# Altium PCB PCB2.PcbDoc
Units mil, origin at the board's own origin, x right, y up, seen from the top; angles counter-clockwise.
Board outline 2785 x 1790 mil, 2 copper layers (Top Layer, Bottom Layer); 33 components, 24 nets, 140 pads, 15 vias.
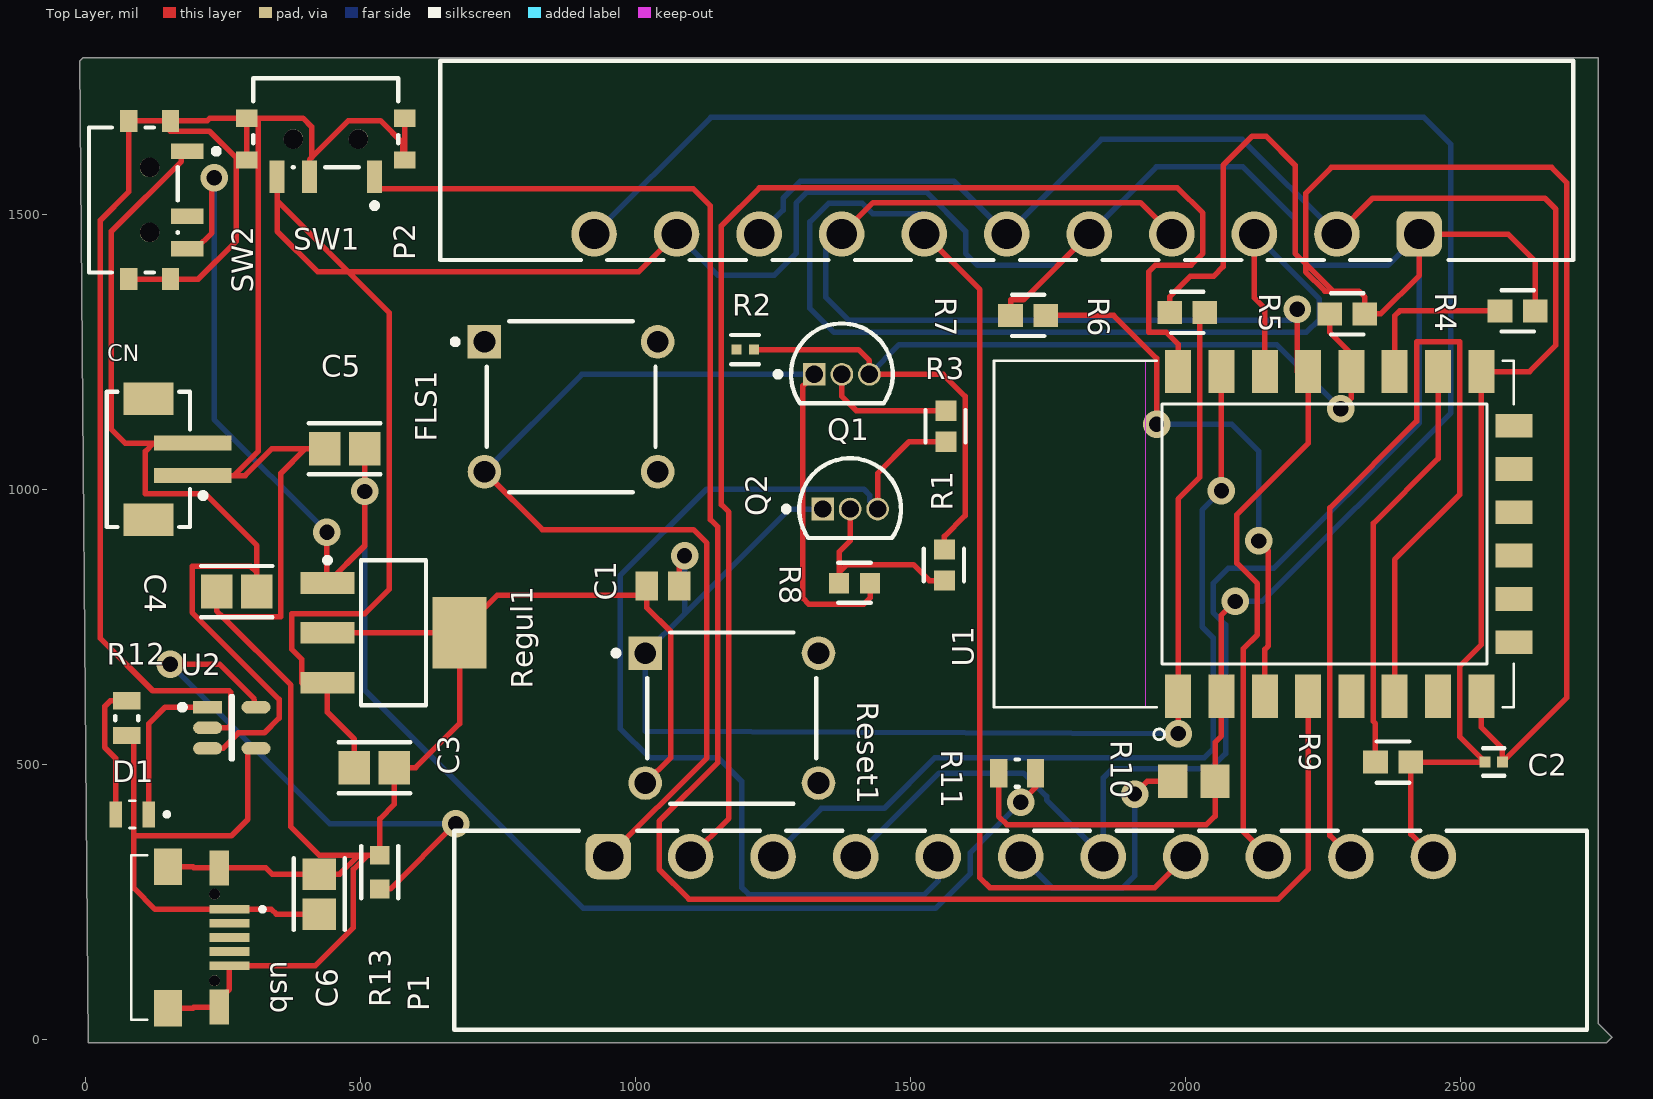
[diagram p0: Top Layer view]
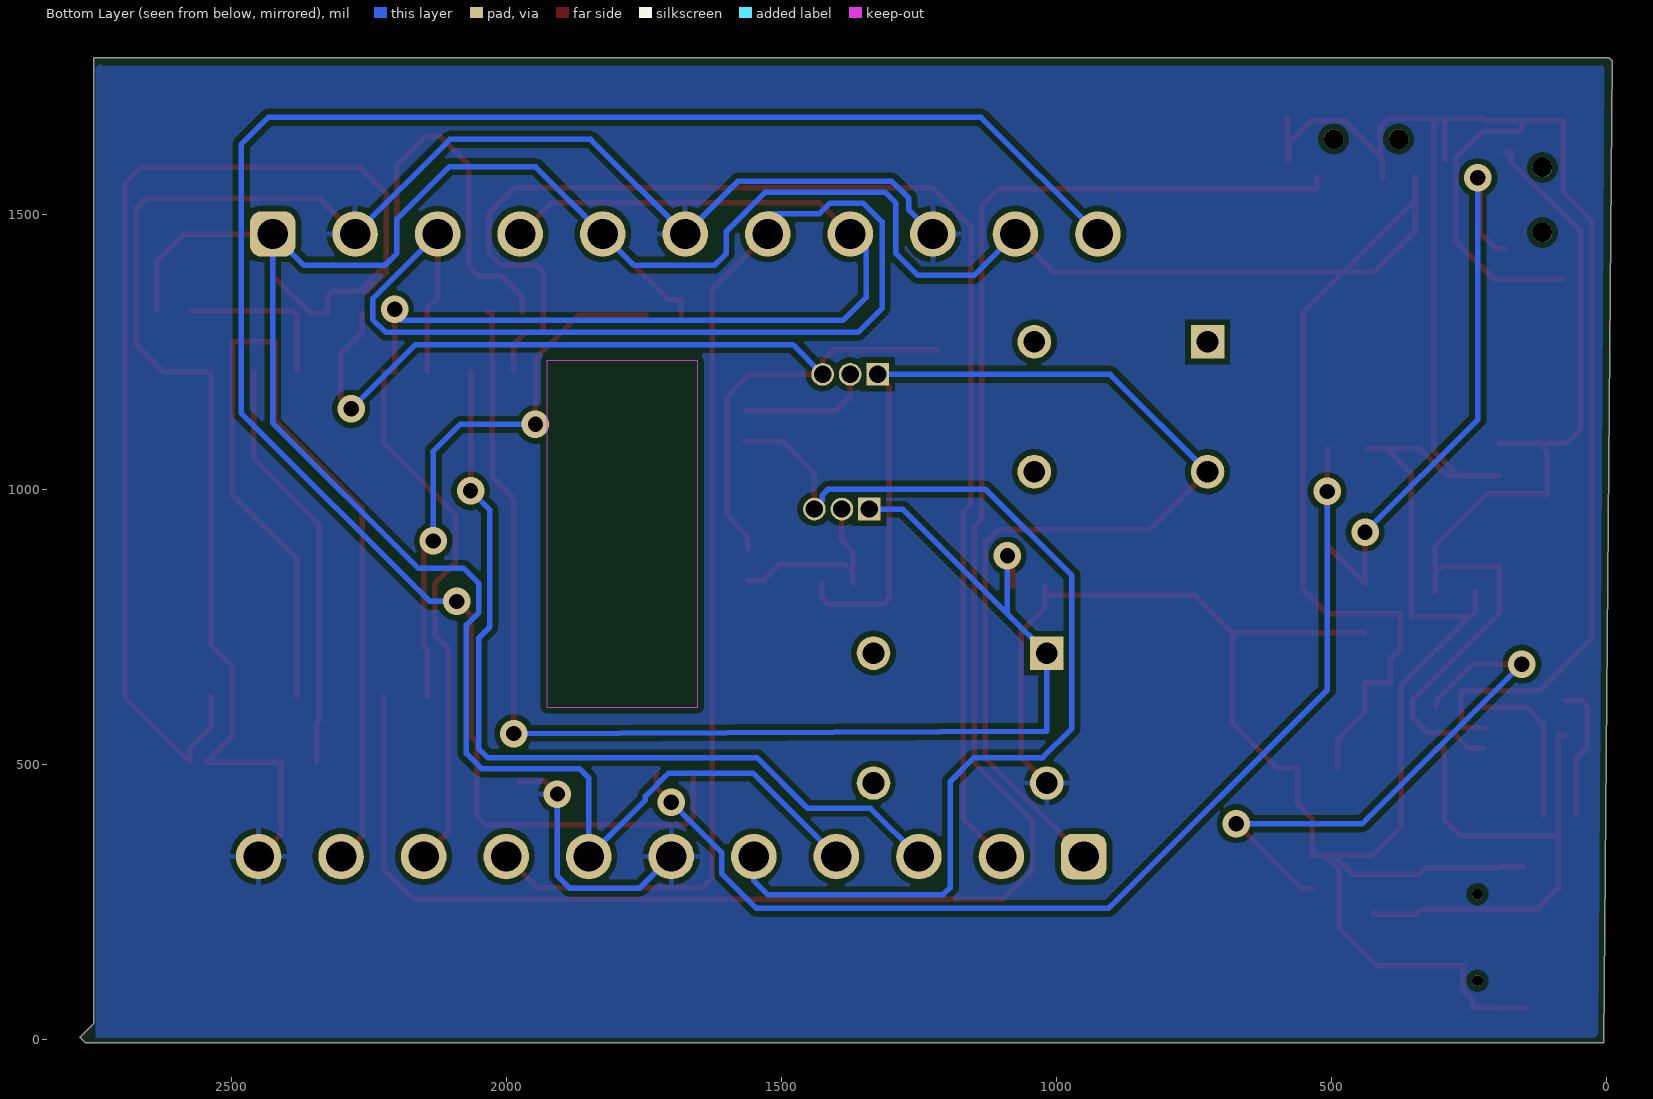
[diagram p1: Bottom Layer view, seen from below]
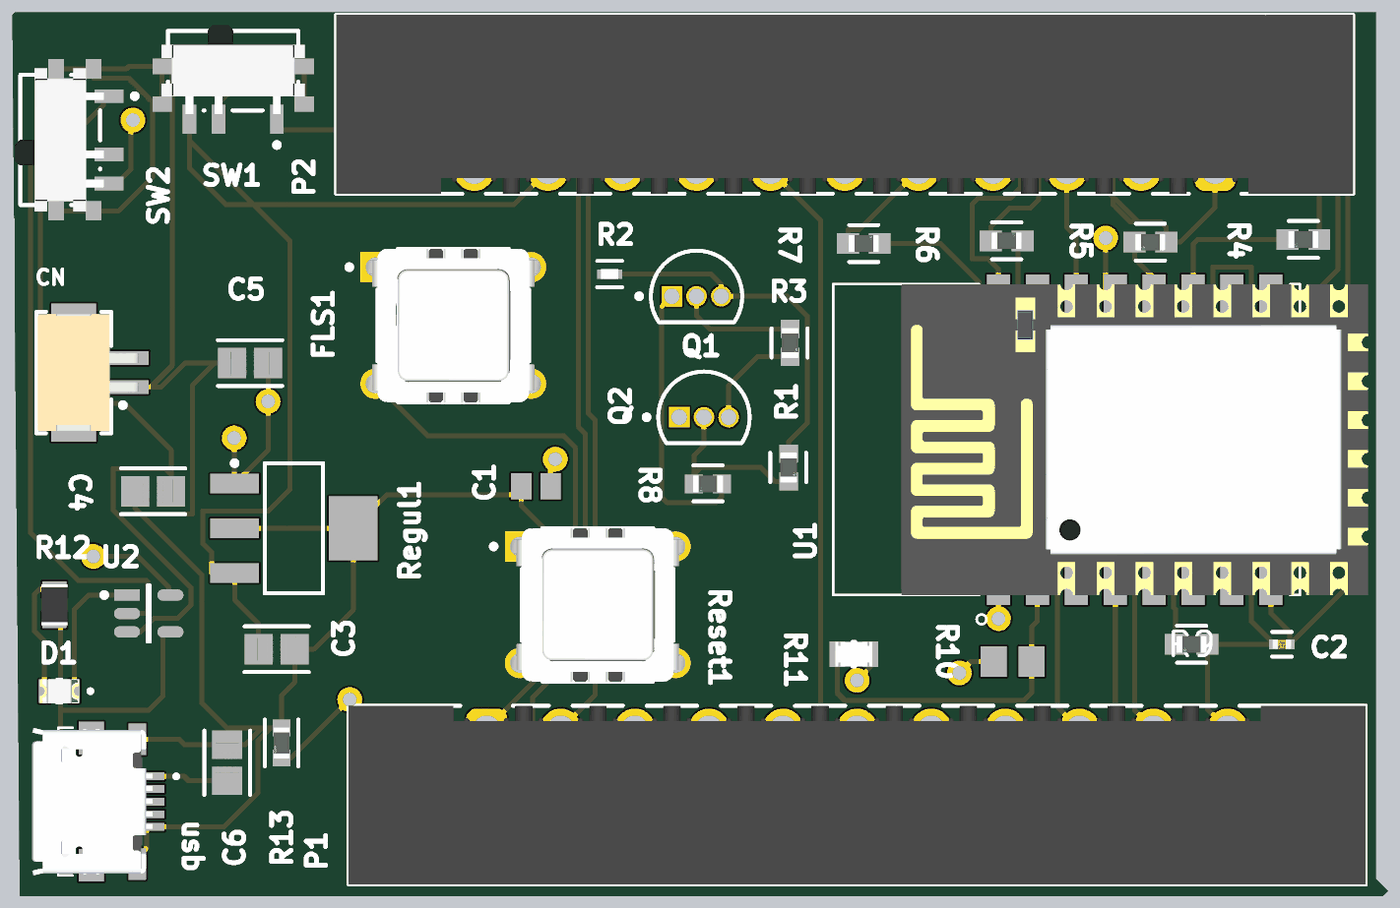
[diagram p2: 3D render of the assembled board from above, using the file's embedded part models]

## Layer stack, top to bottom
Top Solder: solder mask 0.4, Solder Resist, Dk 3.5
Top Layer: signal copper 1.4
Dielectric 1: dielectric 12.6, FR-4, Dk 4.8
Bottom Layer: signal copper 1.4
Bottom Solder: solder mask 0.4, Solder Resist, Dk 3.5

## Board outline
5,-5 2765,-5 2775,5 2750,30 2750,1785 -5,1785 -10,1780

## Design rules (kind name [scope] priority, off if disabled: settings)
Clearance Clearance_3 [All] p1: gap=10 ignorepadtopadclearanceinfootprint=TRUE
Clearance Clearance_2 [All] p2: gap=10 ignorepadtopadclearanceinfootprint=TRUE
Clearance Clearance_1 [All] p3: gap=10 ignorepadtopadclearanceinfootprint=TRUE
Clearance [All] p4: gap=10 ignorepadtopadclearanceinfootprint=FALSE
PolygonConnect [All] p1: connectstyle=Relief reliefconductorwidth=10 reliefentries=4 polygonreliefangle="90 Angle" airgapwidth=10
RoutingVias [All] p1: holewidth=28 width=50 viastyle="Through Hole" minholewidth=28 minwidth=50 maxholewidth=28 maxwidth=50
SolderMaskExpansion [All] p1: expansion=4 istentingtop=FALSE
Width [All] p1: maxlimit=10 minlimit=10 preferedwidth=10
30 further rules are at their usual default settings.

## Components (designator, comment, footprint, x,y, rotation, side; value= is the part's Value field where it differs from the comment)
C1 "4.7 nF" CAPC2013X135X50LL15T20 1050,825 r180 top
C2 "C0402C104K4RACTU" FP-C0402-BB-MFG 2560,505 r180 top value="0.10 μF"
C3 "10 uF" FP-CL21-IPC_A 525,495 r0 top
C4 "4.7 uF" FP-CL21-IPC_A 275,815 r180 top
C5 "10 uF" FP-CL21-IPC_A 471.23,1074.76 r180 top
C6 "4.7 uF" FP-CL21-IPC_A 425,265 r90 top
CN "679302124022" 679302124022 114.29,1055.47 r270 top
D1 "KT-0805W" LED_KT-0805W 85,410 r180 top
FLS1 "ESE-20C421" FP-ESE-20C421-MFG 882.69,1150.95 r0 top
P1 "691701350011B" 691701350011B 1700.14,199.4 r0 top
P2 "691701350011B" 691701350011B 1674.72,1598.87 r180 top
Q1 "BC547C" ONSC-TO-92-3-29-11 1375,1210 r0 top
Q2 "BC547C" ONSC-TO-92-3-29-11 1390,965 r0 top
R1 "22k" FP-CRCW0603-e3-IPC_B 1561.54,863.27 r270 top value=22kR
R2 "330" FP-CRCW0402-e3-IPC_C 1199.17,1255 r0 top
R3 "22k" FP-CRCW0603-e3-IPC_B 1564.29,1115.53 r270 top value=22kR
R4 "12k" FP-CRCW0603-e3-IPC_A 2603.52,1325.15 r180 top value=12kR
R5 "12k" FP-CRCW0603-e3-IPC_A 2293.74,1319.65 r180 top value=12kR
R6 "12k" FP-CRCW0603-e3-IPC_A 2002.78,1322.4 r0 top value=12kR
R7 "12k" FP-CRCW0603-e3-IPC_A 1713.64,1316.9 r0 top value=12kR
R8 "22k" FP-CRCW0603-e3-IPC_B 1398.17,830 r180 top value=22kR
R9 "12k" FP-CRCW0603-e3-IPC_A 2377.1,505 r180 top value=12kR
R10 "47k" RESC2013X70X40ML20T20 2015,470 r180 top
R11 "15k" FP-CRCW0805-e3-IPC_C 1693.5,485 r180 top
R12 "470" RESC2013X60X35LL10T20 75,585 r270 top
R13 "2k" FP-AC0603-IPC_B 535,305 r270 top
Regul1 "TC1262-3.3VDBTR" SOT-223-DB3_M 560,740 r0 top
Reset1 "ESE-20C421" FP-ESE-20C421-MFG 1175,585 r0 top
SW1 "PCM12SMTR" FP-PCM12SMTR-MFG 436.95,1667.19 r180 top
SW2 "PCM12SMTR" FP-PCM12SMTR-MFG 87.01,1526.88 r270 top
U1 "ESP8266-12E/ESP-12E" XCVR_ESP8266-12E/ESP-12E 2261.89,919.72 r90 top
U2 "MCP73831T-2ACI/OT" FP-C04-091-OT-IPC_B 266.05,567.4 r0 top
usb "MICROQTJ" SHOUHAN_MICROQTJ 234.65,186.26 r270 top (schematic designator J1)

## Footprints (in the part's own frame and the unit in brackets; to place one, negate y for a bottom-side part, rotate by r counter-clockwise, add the part's x,y. Pads: shape width x height; smd on the part's side, far side on the other; paste and mask are expansions set on the pad)
679302124022 [mm] "1.50mm SMT Male Vertical Shrouded Header, 2p"
  rect 0.7x3.6 smd: 1(0.75,2.05) 2(-0.75,2.05)
  rect 1.5x2.3 smd: MP1(-2.8,0) MP2(2.8,0)
  silkscreen extent -3.13,-1.93 3.13,2.65, body extent -3,-1.85 3,3.35, height 5.49
691701350011B [mm] "Horizontal PCB Header THR Type with Flanges, pitch 3.81mm, 11p"
  rrect50% 2.1x2.1 hole 1.4: 1(-19.05,3.4)
  round 2.1 hole 1.4: 2(-15.24,3.4) 3(-11.43,3.4) 4(-7.62,3.4) 5(-3.81,3.4) 6(0,3.4) 7(3.81,3.4) 8(7.62,3.4) 9(11.43,3.4) 10(15.24,3.4) 11(19.05,3.4)
  silkscreen extent -26.15,-4.6 26.15,4.6, body extent -26.15,-4.6 26.15,4.6, height 7.35
CAPC2013X135X50LL15T20 [mm] "Chip Capacitor, 2-Leads, Body 2.00x1.25mm, IPC High Density"
  rect 1.05x1.35 smd: 1(-0.75,0) 2(0.75,0)
  body extent -1.08,-0.7 1.07,0.7, height 1.35
FP-AC0603-IPC_B [mil]
  rect 33.81x35.91 smd paste+0 mask+0: 1(-30.58,0) 2(30.58,0)
  silkscreen extent -47,-34 47,34, body extent -57,-28 57,28, height 10
FP-C04-091-OT-IPC_B [mm]
  rect 1.338x0.578 smd paste+0 mask+0: 1(-1.116,0.95)
  rrect100% 1.338x0.578 smd paste+0 mask+0: 2(-1.116,0) 3(-1.116,-0.95) 4(1.116,-0.95) 5(1.116,0.95)
  silkscreen extent -2.41,-1.45 0.05,1.45
FP-C0402-BB-MFG [mm]
  rect 0.52x0.52 smd paste+0 mask+0: 1(-0.4,0) 2(0.4,0)
  silkscreen extent -0.5,-0.64 0.5,0.64, body extent -0.8,-0.4 0.8,0.4, height 0.25
FP-CL21-IPC_A [mil]
  rect 57.27x61.27 smd paste+0 mask+0: 1(-36.45,0) 2(36.45,0)
  silkscreen extent -65,-46 65,46, body extent -85,-50 85,50, height 10
FP-CRCW0402-e3-IPC_C [mil]
  rect 18.43x18.6 smd paste+0 mask+0: 1(-15.83,0) 2(15.83,0)
  silkscreen extent -25,-27 25,27, body extent -29,-15 29,15, height 10
FP-CRCW0603-e3-IPC_A [mil]
  rect 44.69x41.82 smd paste+0 mask+0: 1(-32.1,0) 2(32.1,0)
  silkscreen extent -30,-37 30,37, body extent -74,-41 74,41, height 10
FP-CRCW0603-e3-IPC_B [mil]
  rect 36.81x37.88 smd paste+0 mask+0: 1(-28.17,0) 2(28.17,0)
  silkscreen extent -30,-37 30,35, body extent -56,-29 56,29, height 10
FP-CRCW0805-e3-IPC_C [mil]
  rect 31.75x51.5 smd paste+0 mask+0: 1(-33.5,0) 2(33.5,0)
  silkscreen extent -3,-25 3,25, body extent -53,-31 53,31, height 10
FP-ESE-20C421-MFG [mm]
  rect 1.55x1.55 hole 1 paste-2539.97 mask+0: a(-4,3)
  round 1.55 hole 1 paste-2539.97 mask+0: b(-4,-3) c(4,3) d(4,-3)
  silkscreen extent -5.47,-3.95 3.9,3.95, body extent -4.87,-4.05 4.87,4.05, height 0.25
FP-PCM12SMTR-MFG [mm]
  rect 0.7x1.5 smd paste+0 mask+0: 1(-2.25,2.5) 2(0.75,2.5) 3(2.25,2.5)
  rect 1x0.8 smd paste+0 mask+0: 4(-3.65,1.715) 5(3.65,1.715) 6(-3.65,-0.215) 7(3.65,-0.215)
  round 0.9 hole 0.9 unplated paste-2539.97 mask+0: ""(-1.5,0.75) ""(1.5,0.75)
  silkscreen extent -3.35,-2.05 3.35,3.95, body extent -4.25,-2.15 4.25,3.35, height 0.25
LED_KT-0805W [mm]
  rect 0.57x1.2 smd: A(0.765,0) C(-0.765,0)
  silkscreen extent -1.7,-0.62 0.13,0.62, body extent -1,-0.63 1,0.63, height 0.8
ONSC-TO-92-3-29-11 [mm] "TO, 3-Leads, Body Dia 4.7mm, Pitch 1.27mm"
  rect 1.05x1.05 hole 0.8: 1(-1.27,0)
  round 1.05 hole 0.8: 2(0,0) 3(1.27,0)
  silkscreen extent -3.07,-1.34 2.35,2.35, body extent -2.35,-1.33 2.36,2.36, height 7.87
RESC2013X60X35LL10T20 [mm] "Chip Resistor, 2-Leads, Body 2.1x1.35mm, IPC High Density"
  rect 0.8x1.25 smd: 1(-0.8,0) 2(0.8,0)
  silkscreen extent -0.1,-0.53 0.1,0.53, body extent -1.05,-0.67 1.05,0.68, height 0.6
RESC2013X70X40ML20T20 [mm] "Chip Resistor, 2-Leads, Body 2.00x1.25mm, IPC Low Density"
  rect 1.35x1.55 smd: 1(-0.975,0) 2(0.975,0)
  body extent -1.1,-0.72 1.1,0.72, height 0.7
SHOUHAN_MICROQTJ [mm]
  rect 0.4x1.85 smd: 1(-1.3,0.685) 2(-0.65,0.685) 3(0,0.685) 4(0.65,0.685) 5(1.3,0.685)
  rect 1.625x0.9 smd: SH1(-3.212,0.21) SH2(3.212,0.21)
  rect 1.69x1.3 smd: SH3(-3.27,-2.15) SH4(3.27,-2.15)
  round 0.5 hole 0.5 unplated: ""(-2,0) ""(2,0)
  silkscreen extent -3.8,-3.85 3.8,2.31, body extent -3.8,-5.2 3.8,1, height 2.58
SOT-223-DB3_M [mm] "SOT223, 4-Leads, Body 6.5x3.5mm, Pitch 2.3mm, Lead Span 7mm, IPC Low Density"
  rect 2.5x1 smd: 1(-3.05,2.3) 2(-3.05,0) 3(-3.05,-2.3)
  rect 2.5x3.3 smd: 4(3.05,0)
  silkscreen extent -3.17,-3.35 1.5,3.47, body extent -1.85,-3.35 1.85,3.35, height 1.8
XCVR_ESP8266-12E/ESP-12E [mm]
  rect 2x1.2 smd: 1(-7.5,7) 2(-7.5,5) 3(-7.5,3) 4(-7.5,1) 5(-7.5,-1) 6(-7.5,-3) 7(-7.5,-5) 8(-7.5,-7) 15(7.5,-7) 16(7.5,-5) 17(7.5,-3) 18(7.5,-1) 19(7.5,1) 20(7.5,3) 21(7.5,5) 22(7.5,7)
  rect 1.1x1.7 smd: 9(-5,-8.5) 10(-3,-8.5) 11(-1,-8.5) 12(1,-8.5) 13(3,-8.5) 14(5,-8.5)
  Keep-Out Layer region: 8,8.51 -8.009,8.51 -8.009,15.5 8,15.5
  Keep-Out Layer region: 8,8.51 -8.009,8.51 -8.009,15.5 8,15.5
  silkscreen extent -9.5,-8.5 8,15.5, body extent -8,-12 8,12, height 3

## Part data
C1: library part CMP-2007-03450-1, Manufacturer=Vitramon, Part Number=VJ0805Y472KXACW1BC
C2: library part CMP-2008-02108-2, "CAP CER 0.1UF 16V X7R 0402", Capacitance="0.10 μF", Manufacturer=Kemet, Package=C0402-BB, Temperature="-55°C to +125°C", Temperature Characteristic=X7R, Temperature Coefficient=15%, Temperature Range High=+125°C, Temperature Range Low=-55°C, Tolerance=0.1, Voltage Rating="16 V", Automotive=No, Category=Cap, ComponentLink2Description=Datasheet, ComponentLink2URL=https://content.kemet.com/datasheets/KEM_C1002_X7R_SMD.pdf, Device Class L1="Passive Components", Device Class L2=Capacitors, Device Class L3="Ceramic Capacitors", Digikey Description="CAP CER 0.1UF 16V X7R 0402", Height=0.55mm, Ipc Land Pattern Name=CAPC10050X50, Lead Free=Yes, Manufacturer Part Number=C0402C104K4RACTU, Material=Ceramic, Mouser Description="Cap Ceramic 0.1uF 16V X7R 10% SMD 0402 125?C Paper T/R - Tape and Reel (Alt: C0402C104K4RAC TU)", Octopart=https://octopart.com/c0402c104k4ractu-kemet-94158, RoHS=TRUE
C3 C5: library part CMP-13271-002975-1, "CL21 Series 0805 10uF 25V ±10% Tolerance X5R Multilayer Ceramic Chip Capacitor", Capacitance=10uF, Case Code (Imperial)=0805, Case Code (Metric)=2012, Dielectric=X5R, Max Operating Temperature=85°C, Min Operating Temperature=-55°C, Package Quantity=1, Tolerance=10%, Voltage Rating=25V, Case/Package=0805, Depth=1.25mm, Height=1.25mm, Length=2mm, Mount="Surface Mount", Packaging="Tape and Reel", Radiation Hardening=No, Thickness=0.057inch, Width=0.049inch
C4 C6: library part CMP-13271-002624-1, "CL21 Series 0805 4.7uF 25V ±10% Tolerance X5R Multilayer Ceramic Chip Capacitor", Capacitance=4.7uF, Case Code (Imperial)=0805, Case Code (Metric)=2012, Dielectric=X5R, Max Operating Temperature=85°C, Min Operating Temperature=-55°C, Package Quantity=1, Tolerance=10%, Voltage Rating=25V, Case/Package=0805, Depth=1.25mm, Height=1.25mm, Lead Free="Lead Free", Length=2mm, Mount="Surface Mount", Packaging="Tape and Reel", Radiation Hardening=No, Thickness=0.055inch, Voltage Rating (DC)=25V, Width=0.049inch
CN: library part CMP-1502-00721-2, Color="Beige, White", Contact Resistance=20mΩ, Current Rating=1A, Flammability Rating="UL94 V-0", Insulation Resistance=100MΩ, Max Operating Temperature=85°C, Min Operating Temperature=-25°C, Operating Supply Voltage=50V, Connector Type="Male Pin", Contact Gender=Male, Contact Material=Copper, Contact Plating=Tin, Gender=Male, Height=5mm, Housing Material=Nylon, Insulation=Insulated, Lead Pitch=1.5mm, Length=6mm, Mount="Surface Mount", NexarPartId=18818281, Number of Contacts=2, Number of Pins=2, Number of Positions=2, Number of Rows=1, Orientation=Vertical, Packaging="Tape and Reel", Pitch=1.5mm, REACH SVHC=Unknown, RoHS=Compliant, Termination=SMD/SMT, Voltage Rating=50V, Width=6mm
D1: "Light Emitting Diodes", Package=Package, Check_prices=https://www.snapeda.com/parts/KT-0805W/Hubei+KENTO+Elec/view-part/?ref=eda, MF="Hubei KENTO Elec", MP=KT-0805W, SnapEDA_Link=https://www.snapeda.com/parts/KT-0805W/Hubei+KENTO+Elec/view-part/?ref=snap
FLS1 Reset1: library part CMP-05613-000006-1, "SWITCH PUSH SPST-NO 0.1A 14V", Contact Current Rating=100mA, Max Operating Temperature=80°C, Max Voltage Rating (DC)=14V, Min Operating Temperature=-30°C, Operating Force=4N, Package Quantity=1200, Actuator Length=5.5mm, Actuator Type=Lever, Current Rating=100mA, Lead Free="Lead Free", Mount="Through Hole", Orientation=Straight, Packaging=Bulk, Radiation Hardening=No, REACH SVHC="No SVHC", RoHS Compliant=Yes, Series=ESE20C, Switch Function=Off-Mom, Termination="PC Pin", Throw Configuration=SPST, Voltage Rating (DC)=14V
P1 P2: library part CMP-1502-02023-2, Color=Black, Connector Type="Terminal Block", Contact Material=Brass, Contact Plating=Tin, Gender=Male, Housing Material=Polymer, Lead Pitch=3.81mm, NexarPartId=22866739, Number of Contacts=11, Number of Pins=11, Packaging="Tape and Reel", REACH SVHC="No SVHC", RoHS=Compliant, Termination=PCB
Q1 Q2: library part CMP-1048-01437-1, "Amplifier Transistor, NPN Silicon, 3-Pin TO-92, Bulk Box", Manufacturer="On Semiconductor", ComponentLink1Description="Manufacturer URL", ComponentLink1URL=http://www.onsemi.com/, ComponentLink2Description=Datasheet, ComponentLink2URL=http://www.onsemi.com/pub_link/Collateral/BC546-D.PDF, ComponentLink3Description="Package Specification", ComponentLink3URL=http://www.onsemi.cn/pub_link/Collateral/2N6426-D.PDF, DatasheetVersion="Rev. 7", fT Min (MHz)=150, IC Continuous (A)=0.1, Mounting Technology="Through Hole", PackageDescription="3-Pin Transistor Outline, Body 4.825 x 3.685 mm, Pitch 1.27 mm", PackageReference=TO-92-3-29-11_AM_SL, PackageVersion="Rev. AM", Packing="Bulk Box", PartNumber=BC547C, Polarity=NPN, RoHS=FALSE
R1 R3 R8: library part CMP-2000-03092-2, "RES Thick Film, 22kΩ, 1%, 0.1W, 100ppm/°C, 0603", Case Code (Imperial)=0603, Case Code (Metric)=1608, Max Operating Temperature=155°C, Max Power Dissipation=100mW, Min Operating Temperature=-55°C, Package Quantity=10, Resistance=22kR, Temperature Coefficient=100ppm/°C, Tolerance=1%, Voltage Rating=75V, Case/Package=0603, Composition="Thick Film", Contact Plating=Tin, Depth=0.85mm, Features="Automotive AEC-Q200", Height=0.45mm, Lead Free="Lead Free", Length=1.55mm, Military Standard=Not, Mount="Surface Mount", Number of Terminations=2, Packaging="Tape and Reel", Power Rating=100mW, Radiation Hardening=No, Termination=SMD/SMT, Voltage Rating (DC)=75V, Weight=7.1E-05oz, Width=0.85mm
R2: library part CMP-2002-08521-2, "RES Thick Film, 330kΩ, 1%, 0.063W, 100ppm/°C, 0402", Case Code (Imperial)=0402, Case Code (Metric)=1005, Max Operating Temperature=155°C, Max Power Dissipation=63mW, Min Operating Temperature=-55°C, Package Quantity=10, Resistance=330kR, Temperature Coefficient=100ppm/°C, Tolerance=1%, Voltage Rating=50V, Case/Package=0402, Composition="Thick Film", Contact Plating=Tin, Depth=0.5mm, Features="Automotive AEC-Q200", Height=0.35mm, Lead Free="Lead Free", Length=1mm, Military Standard=Not, Number of Terminations=2, Packaging="Tape and Reel", Power Rating=63mW, Termination=SMD/SMT, Voltage Rating (DC)=50V, Weight=2.3E-05oz, Width=0.02inch
R4 R5 R6 R7 R9: library part CMP-2000-03877-2, "RES Thick Film, 12kΩ, 1%, 0.1W, 100ppm/°C, 0603", Case Code (Imperial)=0603, Case Code (Metric)=1608, Max Operating Temperature=155°C, Max Power Dissipation=100mW, Min Operating Temperature=-55°C, Package Quantity=10, Resistance=12kR, Temperature Coefficient=100ppm/°C, Tolerance=1%, Voltage Rating=75V, Case/Package=0603, Composition="Thick Film", Contact Plating=Tin, Depth=0.85mm, Features="Automotive AEC-Q200", Height=0.45mm, Lead Free="Lead Free", Length=1.55mm, Military Standard=Not, Mount="Surface Mount", Number of Terminations=2, Packaging="Tape and Reel", Power Rating=100mW, Radiation Hardening=No, Termination=SMD/SMT, Voltage Rating (DC)=75V, Weight=7.1E-05oz, Width=0.033inch
R10: library part CMP-2001-00421-1, Manufacturer=Panasonic, Part Number=ERJ-6GEYJ473V
R11: library part CMP-2001-04967-2, "RES Thick Film, 15kΩ, 1%, 0.125W, 100ppm/°C, 0805", Case Code (Imperial)=0805, Case Code (Metric)=2012, Max Operating Temperature=155°C, Max Power Dissipation=125mW, Min Operating Temperature=-55°C, Package Quantity=10, Resistance=15kR, Temperature Coefficient=100ppm/°C, Tolerance=1%, Voltage Rating=150V, Case/Package=0805, Composition="Thick Film", Contact Plating=Tin, Depth=1.25mm, Features="Automotive AEC-Q200", Height=0.45mm, Lead Free="Lead Free", Length=2mm, Military Standard=Not, Mount="Surface Mount", Number of Terminations=2, Packaging="Tape and Reel", Power Rating=125mW, Radiation Hardening=No, Termination=SMD/SMT, Voltage Rating (DC)=150V, Weight=0.000194oz, Width=0.049inch
R12: library part CMP-2000-06961-1, "Chip Resistor, 470 Ohm, +/- 1%, 125 mW, -55 to 155 degC, 0805 (2012 Metric), RoHS, Tape and Reel", Manufacturer=Yageo, Package Description="2-Pin Surface Mounted Device, Body 2 x 1.25 mm", Package Reference=0805, Power Rating=250mW, Resistance=470ohm, Resistance Tolerance=±1%, Resistor Case Style=0805[2012Metric], Resistor Element Type=ThickFilm, Temperature Coefficient=±100ppm/°C, Voltage Rating=150V, Automotive Qualification Standard=-, Datasheet URL=http://www.yageo.com/documents/recent/PYu-RC_Group_51_RoHS_L_7.pdf, Datasheet Version="Rev. 7, 05/2017", Manufacturer URL=http://www.yageo.com/, Mounting Technology=SurfaceMount, MSL=MSL1-Unlimited, Packaging=Tape&Reel, Product Range=-, SVHC=ToBeAdvised
R13: library part CMP-2000-04836-2, "RES 2kΩ 1.00% 0.1W 0603", Case Code (Imperial)=0603, Case Code (Metric)=1608, Max Operating Temperature=155°C, Max Power Dissipation=100mW, Min Operating Temperature=-55°C, Ratings=AEC-Q200, Resistance=2kR, Resistor Type="Thick Film", Temperature Coefficient=100ppm/°C, Tolerance=1%, Voltage Rating=50V, Case/Package=0603, Construction=Rectangular, Depth=0.8mm, Features="Moisture Resistant", Height=0.45mm, Lead Free="Lead Free", Length=1.6mm, Military Standard=Not, Number of Terminations=2, Packaging="Tape and Reel", Power Rating=100mW, Series=AC, Size Code=0603, Termination=SMD/SMT, Width=0.8mm
Regul1: library part CMP-0136-00481-1, "500mA Fixed Output CMOS LDO, 3-Pin SOT-223, Extended Temperature, Tape and Reel", DatasheetVersion="revB, 2002", PackageDescription="3-Lead Plastic Small Outline Transistor (DB) [SOT-223]", PackageReference=SOT-223-DB3, PackageVersion="revBB, Aug-2009"
SW1 SW2: library part CMP-2000-06884-2, "SWITCH SLIDE SPDT 300MA 6V", Contact Current Rating=300mA, Contact Resistance=70mR, Insulation Resistance=100mR, Max Operating Temperature=85°C, Max Voltage Rating (DC)=6V, Min Operating Temperature=-20°C, Package Quantity=1, Actuator Length=1.5mm, Actuator Material=Nylon, Actuator Type=Standard, Contact Material="Copper Alloy", Contact Plating=Silver, Current Rating=300mA, Depth=5mm, Lead Free="Lead Free", Length=7.7mm, Max Current Rating=300mA, Mechanical Life=10000Cycles, Mount="Surface Mount", Orientation="Right Angle", Packaging="Tape and Reel", REACH SVHC="No SVHC", Switch Function=On-On, Switch Travel=1.5mm, Termination="Gull Wing", Throw Configuration=SPDT, Voltage Rating (AC)=6V, Voltage Rating (DC)=6V, Width=6.7mm
U1: "This WiFi module has a 32-bit MCU micro and clock speeds supporting 80 MHz or 160 MHz. Supports the RTOS and integrated Wi-Fi MAC/BB/RF/PA/LNA, and has an on-board antenna.", Package=None, Availability="Not in stock", Check_prices=https://www.snapeda.com/parts/ESP8266-12E/ESP-12E/AI-Thinker/view-part/?ref=eda, MF=AI-Thinker, MP=ESP8266-12E/ESP-12E, Price=None, SnapEDA_Link=https://www.snapeda.com/parts/ESP8266-12E/ESP-12E/AI-Thinker/view-part/?ref=snap
U2: library part CMP-0133-00143-2, "IC CONTROLLR LI-ION 4.2V SOT23-5", Case/Package=SOT-23, Drain to Source Resistance=350mR, Max Charge Current=500mA, Max Input Voltage=6V, Max Operating Temperature=85°C, Max Output Voltage=4.5V, Max Power Dissipation=1.54W, Min Operating Temperature=-40°C, Min Output Voltage=4.168V, Min Supply Voltage=3.75V, Output Voltage=4.2V, Voltage Rating=4.534V, Contact Plating=Tin, Height=0.051inch, Lead Free="Lead Free", Length=0.122inch, Max Supply Voltage=6V, Mount="Surface Mount", Number of Cells=1, Number of Channels=1, Number of Outputs=1, Number of Pins=5, Output Current=500mA, Packaging="Tape and Reel", Radiation Hardening=No, REACH SVHC="No SVHC", Termination=SMD/SMT, Weight=0.00709oz, Width=0.071inch
usb: Package=None, Availability="Not in stock", Check_prices=https://www.snapeda.com/parts/MICROQTJ/Shouhan/view-part/?ref=eda, MF="shou han", MP=MICROQTJ, Price=None, SnapEDA_Link=https://www.snapeda.com/parts/MICROQTJ/Shouhan/view-part/?ref=snap

## Via types
v1: diameter 50, hole 28, Top Layer to Bottom Layer, 15 vias

## Nets (pads, with @x,y where several pads share a name; then routed paths per layer and width w, separated by ;. In a path a pad name is that pad's centre, name@x,y a point inside that pad or via, vN(x,y) a via of type N, cw(c..) or ccw(c..) an arc to the next point about the centre after c; other vN are vias at no path point)
GND: C1.2 C2.2 C3.2 C4.2 C5.2 C6.2 CN.1 P1.6 P1.11 P2.2 P2.6 P2.9 R9.1 R10.2 R13.1 Regul1.2 Regul1.4 Reset1.b SW1.2 SW1.4 SW1.5 SW1.6 SW1.7 SW2.4 SW2.5 SW2.6 SW2.7 U1.15 U2.2 usb.5 usb.SH1 usb.SH2 usb.SH3 usb.SH4 | length 10825.2
  Top Layer w10: SW2.7 SW2.5 154.53,1383 205,1383 274.21,1452.21 274.21,1602.79 225,1652 154.53,1652 SW2.4 ; usb.SH4 195,57.52 197.26,59.78 usb.SH2 242.91,73 261.61,91.7 usb.5 418.08,135.08 487,204 487,310 512.58,335.58 ; usb.SH3 195,315 197.26,312.74 usb.SH1 328,312.74 339.29,301.45 C6.2 462,301.45 496.13,335.58 ; CN.1 269.94,1025.94 ; U2.2 259.12,567.4 264,572.29 264,632 261.27,634.73 122.27,634.73 27,730 27,1490 78.54,1541.54 SW2.6 SW2.4 ; C4.2 238.55,780 249.55,769 ; SW1.5 SW1.7 ; SW1.2 407.42,1600 ; C5.2 399.76,1074.76 ; Regul1.2 Regul1.4 ; SW1.6 SW1.4 577,1599.67 577,1630 536,1671 478,1671 411,1604 ; Reset1.b 1064,513.37 1064,742 1020.47,785.53 C1.2@1020.47,808 ; C1.2 C1.2@1020.47,808 ; v1(1907,447) 1930,470 R10.2 ; P2.2 2339.71,1530 2653,1530 2673,1510 2673,1263 2625,1215 U1.15 2537.48,718.48 2498,679 2498,551.25 C2.2 R9.1 2409.2,374.2 P1.11 ; SW2.4 221,1670.58 226.08,1675.65 SW1.7 ; 249.55,769 373.48,645.07 373.48,387.09 425,335.58 496.13,335.58 ; 249.55,769 355.08,769 355.08,1030.08 399.76,1074.76 ; 269.94,1025.94 290,1025.94 338.82,1074.76 399.76,1074.76 ; 269.94,1025.94 314,1070 314,1675.65 ; SW1.7 314,1675.65 ; 314,1675.65 395.35,1675.65 411,1660 411,1604 ; 407.42,1600 407.42,1600.42 411,1604 ; 407.42,1600 411,1603.58 411,1604 ; 496.13,335.58 512.58,335.58 ; 512.58,335.58 R13.1 535,402 561.45,428.45 C3.2 600,495 680.08,575.08 Regul1.4 ; Regul1.4 748.08,808 C1.2@1020.47,808
  Bottom Layer w10: P2.9 1268.09,1508.38 1268.09,1530 1299.44,1561.35 1578.38,1561.35 P2.6 1846.71,1637 2102.73,1637 P2.2 ; P1.6 1757.4,276 1885,276 1907,298 v1(1907,447)
NetC1_1: C1.1 Q2.1 R6.2 Reset1.a U1.1 | length 2496.9
  Top Layer w10: C1.1 1079.53,870.53 v1(1089,880) ; v1(1986.3,557) U1.1 1986.3,983.3 2026,1023 2026,1322.4 R6.2
  Bottom Layer w10: v1(1089,880) 1089,774.59 ; Q2.1 1279.41,965 1089,774.59 ; v1(1986.3,557) 1017.52,561 Reset1.a 1089,774.59
NetC2_1: C2.1 C3.1 P1.4 P1.7 P2.1 P2.5 P2.10 R4.1 R5.1 R6.1 R7.1 Regul1.3 SW1.3 U1.8 | length 9746.5
  Top Layer w10: SW1.3 348.37,1525.63 ; C3.1 488.55,547 439.92,595.63 Regul1.3 393.48,649.45 393.48,691.6 375.08,710 375.08,775 508,775 552,819 552,1322 478,1396 ; P2.10 1005.71,1396 478,1396 ; R7.1 1681.54,1345.08 1704.79,1345.08 P2.5 ; R6.1 1970.68,1350.68 2008.67,1388.67 2051.06,1388.67 2068,1405.61 2068,1590 2121,1643 2146,1643 2199,1590 2199,1430 2218,1411 ; U1.8 2537.48,568 2575.75,529.73 C2.1 2693,622.25 2693,1558 2665,1586 2265,1586 2218,1539 2218,1411 ; R4.1 2635.62,1415.38 2585.99,1465.01 P2.1 2424.72,1390 2354.37,1319.65 R5.1 2325.84,1350.16 ; 348.37,1525.63 478,1396 ; 348.37,1525.63 348.37,1470 422.37,1396 478,1396 ; 2218,1411 2267.84,1361.16 2315,1361.16 2325.84,1350.32 2325.84,1350.16 ; 2218,1411 2218,1396 2253,1361 2315,1361 2325.84,1350.16
  Bottom Layer w10: P2.10 1149.73,1390 1252,1390 1292,1430 1292,1521.35 1312,1541.35 1528.65,1541.35 1600,1470 1600,1430 1622,1408 1767.71,1408 P2.5 1946.71,1587 2104,1587 2199,1492 2199,1430 2221,1408 2367.71,1408 P2.1 2424.72,1121.72 2160,857 2077,857 2050,830 2050,777 2072.61,754.39 2072.61,520.61 2045,493 1867,493 1850.14,476.14 P1.7 1747.26,436.14 1747.26,442.74 1705,485 1551.89,485 P1.4
NetC4_1: C4.1 CN.2 SW2.1 U2.3 | length 1767.2
  Top Layer w10: SW2.1 174.21,1615.46 174.21,1597.21 47,1470 47,1110 72,1085 124,1085 ; CN.2 124,1085 ; U2.3 250,530 278,558 325,558 352,585 352,619 194,777 194,861 300.45,861 311.45,850 ; C4.1 311.45,850 ; 124,1085 109,1070 109,993 217,993 311.45,898.55 311.45,850
NetC5_1: C5.1 R11.1 Regul1.1 SW2.3 | length 3138.8
  Top Layer w10: SW2.3 201,1438.29 229.96,1467.26 229.96,1567 v1(234,1567) ; v1(439,923) 439,830.55 Regul1.1 507.68,898.31 v1(507.68,997) C5.1 ; v1(1700,432) 1727,459 R11.1
  Bottom Layer w10: v1(234,1567) 234,1128 v1(439,923) ; v1(507.68,997) 507.68,636.32 905,239 1545,239 1608,302 1608,340 v1(1700,432)
NetC6_1: C6.1 R12.2 U2.4 usb.1 | length 1010.6
  Top Layer w10: R12.2 88,553.5 88,371 ; U2.4 295,530 295,401 265,371 88,371 ; C6.1 346.89,228.55 338,237.44 usb.1 126.56,237.44 88,276 88,371
NetD1_A: D1.A R12.1 | length 248.9
  Top Layer w10: D1.A 54.88,512 35,531.88 35,606.5 45,616.5 R12.1
NetD1_C: D1.C U2.1 | length 284.3
  Top Layer w10: D1.C 115.12,574.92 145,604.8 U2.1
NetFLS1_b: FLS1.b P1.1 Q1.1 R8.1 | length 2348.8
  Top Layer w10: FLS1.b 830.43,927.62 1105,927.62 1129.43,903.19 1129.43,512.54 P1.1 ; Q1.1 1304,1189 1304,803 1314.67,792.33 1415,792.33 1426.33,803.66 R8.1
  Bottom Layer w10: FLS1.b 902.37,1210 Q1.1
NetP1_2: P1.2 U1.22 | length 2511
  Top Layer w10: P1.2 1169.43,402.54 1169.43,959.58 1156,973.01 1156,1480 1225,1549 1985,1549 2031.06,1502.94 2031.06,1430 2009.73,1408.67 1945,1408.67 1933,1396.67 1933,1286 1965,1286 1986.3,1264.7 U1.22
NetP1_3: P1.3 U1.21 | length 1589.7
  Top Layer w10: v1(2065.04,997.96) U1.21
  Bottom Layer w10: P1.3 1337.89,421 1452,421 1544,513 2034,513 2050,529 2050,731.06 2030,751.06 2030,962.92 v1(2065.04,997.96)
NetP1_5: P1.5 Q2.3 R3.2 | length 1916.3
  Top Layer w10: Q2.3 1440,1030 1497.37,1087.37 R3.2
  Bottom Layer w10: Q2.3 1426,979 1426,990 1415,1001 1129,1001 972,844 972,566 1025,513 1150,513 1193,470 1193,277 1206,264 1525,264 1550.14,289.14 P1.5
NetP1_8: P1.8 P2.3 P2.7 U1.20 | length 3457.1
  Top Layer w10: P2.7 1626,1363.73 1626,294.72 1643.8,276.92 1943.8,276.92 P1.8 ; P2.3 2124.72,1349.06 2143.78,1330 U1.20
  Bottom Layer w10: P2.7 1524.72,1502 1431,1502 1411.65,1521.35 1351.35,1521.35 1317,1487 1317,1330 1361,1286 2219,1286 2243,1310 2243,1346.73 P2.3
NetP1_9: P1.9 P2.4 P2.8 U1.19 | length 2774.1
  Top Layer w10: P2.8 1431.71,1522 1917.73,1522 P2.4 ; P1.9 2105,378.4 2105,711.11 2130.42,736.53 2130.42,829.43 2093,866.85 2093,954.73 2222.52,1084.25 U1.19 2203,1215 v1(2203,1328)
  Bottom Layer w10: P2.8 1346,1436.29 1346,1350 1388,1308 2191,1308 2203,1320 v1(2203,1328)
NetP1_10: P1.10 U1.6 | length 1789.2
  Top Layer w10: P1.10 2262,371.4 2262,967 2420,1125 2420,1269.37 2498,1269.37 2498,991 2380,873 U1.6
NetP2_11: P2.11 R10.1 R11.2 U1.2 | length 3577.5
  Top Layer w10: R11.2 1660,406.25 1675,391.25 2037.63,391.25 2053.39,407 R10.1 2053.39,541 2065.04,552.65 U1.2 2065.04,772.04 v1(2090,797)
  Bottom Layer w10: P2.11 1136.71,1677 2433,1677 2482,1628 2482,1140 2139,797 v1(2090,797)
NetQ1_2: Q1.2 R3.1 | length 240.2
  Top Layer w10: Q1.2 1375,1170 1401.3,1143.7 R3.1
NetQ1_3: Q1.3 R1.1 R2.2 R5.2 U1.18 | length 1852.4
  Top Layer w10: R2.2 1405,1255 1425,1235 Q1.3 1559,1210 1599,1170 1599,953 1561.54,915.54 R1.1 ; R5.2 2261.64,1286.62 2301.26,1247 U1.18 2301.26,1166.52 v1(2282,1147.26)
  Bottom Layer w10: Q1.3 1479,1264 2165.26,1264 v1(2282,1147.26)
NetQ2_2: Q2.2 R1.2 R8.2 | length 352.6
  Top Layer w10: R8.2 1370,850 ; Q2.2 1390,907 1370,887 1370,850 ; R1.2 1533.9,835.1 1505,864 1384,864 1370,850
NetR4_2: R4.2 U1.17 | length 296.2
  Top Layer w10: U1.17 2380,1316 2389.15,1325.15 R4.2
NetR7_2: R7.2 U1.3 | length 1015.3
  Top Layer w10: R7.2 1869.1,1316.9 1947,1239 v1(1947,1119) ; v1(2133,907) 2150.42,889.58 2150.42,716.53 2143.78,709.89 U1.3
  Bottom Layer w10: v1(1947,1119) 2084,1119 2133,1070 v1(2133,907)
NetR9_2: R9.2 U1.16 | length 760.4
  Top Layer w10: R9.2 2345,575 2341,579 2341,939 2458.74,1056.74 U1.16
NetR13_2: R13.2 U2.5 | length 1020.6
  Top Layer w10: v1(154,683) 244,683 306,621 U2.5 ; R13.2 554.42,274.42 v1(673,393)
  Bottom Layer w10: v1(154,683) 444,393 v1(673,393)
NetSW1_1: SW1.1 U1.4 | length 3439.4
  Top Layer w10: SW1.1 525.53,1547 1105,1547 1136,1516 1136,946 1149.43,932.57 1149.43,504.26 1043,397.83 1043,310 1097,256 2168.52,256 2222.52,310 U1.4
pads on no net: CN.MP1 CN.MP2 FLS1.a FLS1.c FLS1.d R2.1 Reset1.c Reset1.d SW1. SW2. SW2.2 U1.5 U1.7 U1.9 U1.10 U1.11 U1.12 U1.13 U1.14 usb. usb.2 usb.3 usb.4

## Polygon pours and split planes (outlines as drawn)
GND on Bottom Layer "GND_L02_P001" (solid, pour order 1): 3.7,1770.86 2735.08,1770.86 2738.84,1774.61 2746.34,1767.11 2746.34,3.72 22.46,3.72 14.96,11.22